# Altium PCB SensorBoard.PcbDoc (part 4 of 5)
Units mm, origin at the board's own origin, x right, y up, seen from the top; angles counter-clockwise.
Board outline 133.86 x 67.84 mm, 4 copper layers (Top Layer, Power Plane, Ground Plane, Bottom Layer), stack 1.586 mm thick; 244 components, 150 nets, 825 pads, 904 vias.
Unrouted connection lines stored in the file: 43.
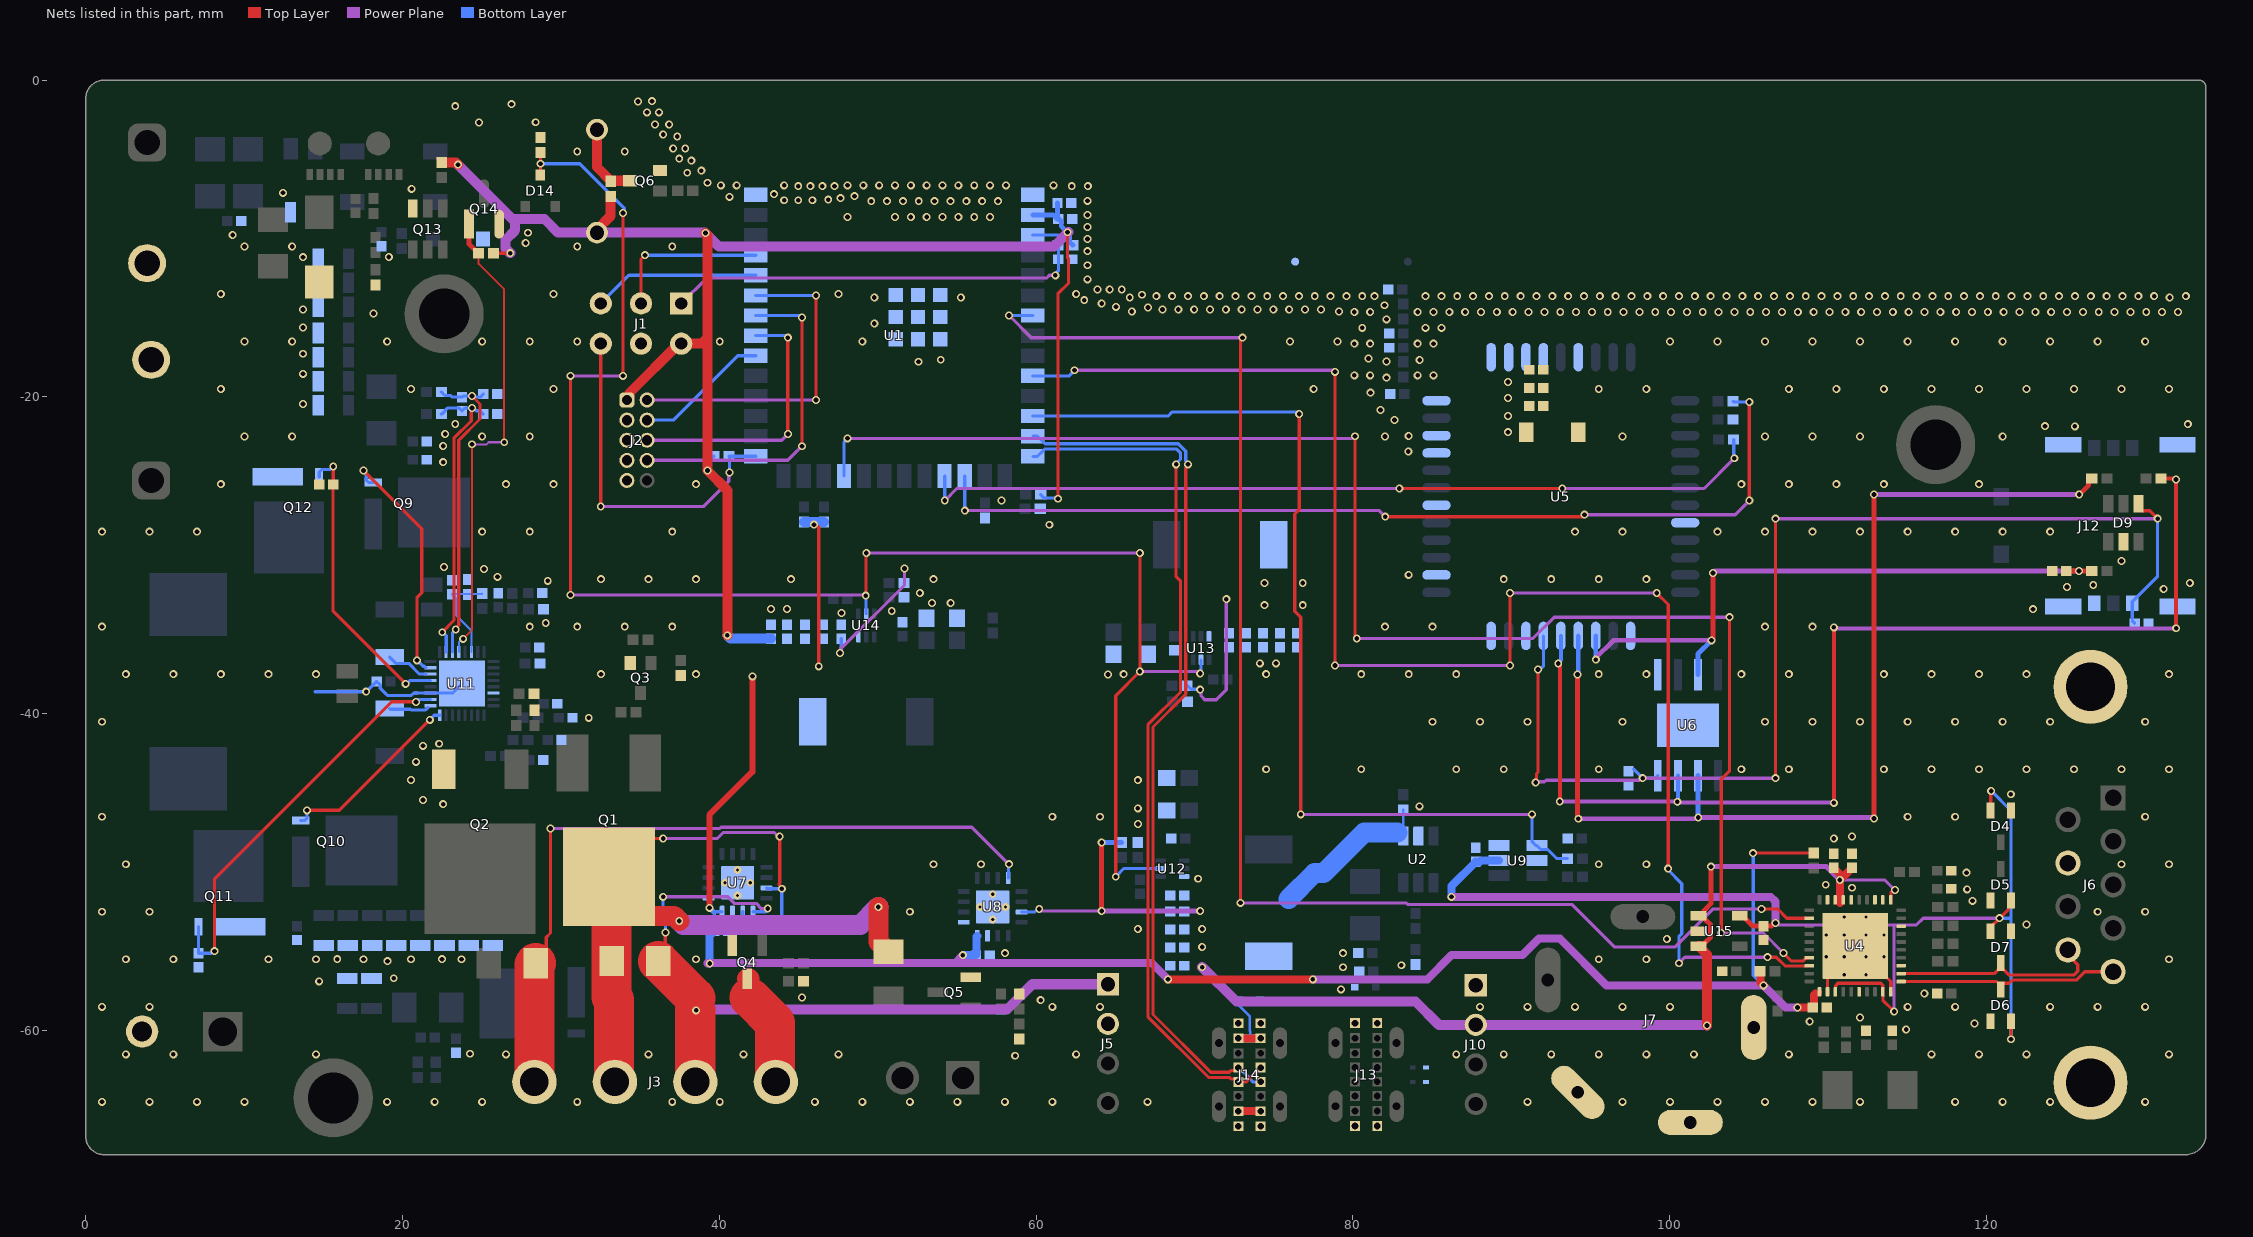
[diagram p4: the nets of this part, all layers, seen from the top]

## Via types
v1: diameter 0.5, hole 0.3, Top Layer to Bottom Layer, tented both sides, 566 vias
v2: diameter 0.5, hole 0.3, Top Layer to Bottom Layer, 318 vias
v3: diameter 0.5, hole 0.2, Top Layer to Bottom Layer, 20 vias

## Nets (pads, with @x,y where several pads share a name; then routed paths per layer and width w, separated by ;. In a path a pad name is that pad's centre, name@x,y a point inside that pad or via, vN(x,y) a via of type N, cw(c..) or ccw(c..) an arc to the next point about the centre after c; other vN are vias at no path point) (continued)
DGND: (continued)
  other v1: 1.025,-64.505 4.025,-64.505 7.025,-64.505 10.025,-64.505 19.025,-64.505 22.025,-64.505 25.025,-64.505 31.025,-64.505 37.025,-64.505 40.025,-64.505 46.025,-64.505 49.025,-64.505 52.025,-64.505 55.025,-64.505 58.025,-64.505 61.025,-64.505 67.025,-64.505 91.025,-64.505 97.025,-64.505 100.025,-64.505 103.025,-64.505 106.025,-64.505 109.025,-64.505 112.025,-64.505 118.025,-64.505 121.025,-64.505 124.025,-64.505 130.025,-64.505 58.674,-61.595 2.525,-61.505 5.525,-61.505 14.525,-61.505 26.525,-61.505 35.525,-61.505 41.525,-61.505 47.525,-61.505 62.525,-61.505 86.525,-61.505 89.525,-61.505 92.525,-61.505 95.525,-61.505 98.525,-61.505 101.525,-61.505 107.525,-61.505 116.525,-61.505 119.525,-61.505 122.525,-61.505 131.525,-61.505 24.257,-61.468 114.935,-59.944 119.253,-59.563 108.839,-59.436 112.014,-59.182 1.025,-58.505 4.025,-58.505 61.025,-58.505 64.025,-58.505 88.025,-58.505 91.025,-58.505 94.025,-58.505 97.025,-58.505 100.025,-58.505 115.025,-58.505 118.025,-58.505 124.025,-58.505 127.025,-58.505 130.025,-58.505 60.285,-58.086 45.212,-57.912 116.078,-57.658 79.248,-57.404 14.732,-56.896 19.442,-56.704 79.375,-56.007 83.058,-55.88 19.05,-55.626 2.525,-55.505 5.525,-55.505 11.525,-55.505 14.525,-55.505 15.875,-55.499 17.525,-55.505 20.525,-55.505 22.479,-55.499 23.72,-55.505 38.525,-55.505 95.525,-55.505 98.525,-55.505 131.525,-55.505 58.039,-55.118 79.375,-55.118 99.822,-54.229 66.421,-53.594 122.538,-53.304 1.025,-52.505 4.025,-52.505 52.025,-52.505 127.025,-52.505 130.025,-52.505 119.126,-51.816 118.786,-51.089 111.519,-50.991 109.855,-50.8 70.231,-50.419 118.745,-50.038 2.525,-49.505 53.525,-49.505 56.525,-49.505 95.525,-49.505 98.525,-49.505 128.525,-49.505 131.525,-49.505 110.363,-47.879 111.506,-47.752 66.431,-46.957 1.025,-46.505 61.025,-46.505 64.025,-46.505 115.025,-46.505 118.025,-46.505 130.025,-46.505 66.421,-45.974 84.201,-45.847 22.56,-45.709 21.29,-45.455 121.539,-45.085 20.528,-44.185 66.421,-44.196 74.525,-43.505 80.525,-43.505 86.525,-43.505 89.525,-43.505 95.525,-43.505 104.525,-43.505 107.525,-43.505 113.525,-43.505 116.525,-43.505 119.525,-43.505 122.525,-43.505 125.525,-43.505 128.525,-43.505 131.525,-43.505 20.841,-43.037 21.29,-42.026 22.306,-41.899 1.025,-40.505 85.025,-40.505 88.025,-40.505 91.025,-40.505 97.025,-40.505 106.025,-40.505 109.025,-40.505 112.025,-40.505 115.025,-40.505 118.025,-40.505 121.025,-40.505 124.025,-40.505 130.025,-40.505 31.75,-40.259 64.532,-37.53 2.525,-37.505 5.525,-37.505 8.525,-37.505 11.525,-37.505 14.525,-37.505 32.525,-37.505 38.525,-37.505 65.525,-37.505 74.525,-37.505 80.525,-37.505 83.525,-37.505 86.525,-37.505 95.525,-37.505 98.525,-37.505 104.525,-37.505 107.525,-37.505 113.525,-37.505 116.525,-37.505 119.525,-37.505 122.525,-37.505 131.525,-37.505 74.122,-36.819 75.138,-36.819 1.025,-34.505 28.025,-34.505 31.025,-34.505 34.025,-34.505 37.025,-34.505 82.025,-34.505 85.025,-34.505 106.025,-34.505 109.025,-34.505 29.037,-34.279 47.706,-33.644 50.881,-33.517 43.261,-33.39 44.277,-33.39 122.936,-33.401 53.421,-33.009 54.606,-33.011 52.659,-32.374 131.191,-32.131 125.095,-32.004 126.746,-31.877 132.842,-31.75 29.164,-31.612 32.525,-31.505 35.525,-31.505 38.525,-31.505 44.525,-31.505 53.525,-31.505 89.525,-31.505 92.525,-31.505 95.525,-31.505 98.525,-31.505 25.989,-31.358 83.52,-31.231 25.146,-30.861 22.606,-30.734 128.524,-30.353 1.025,-28.505 4.025,-28.505 7.025,-28.505 25.025,-28.505 28.025,-28.505 37.025,-28.505 94.025,-28.505 97.025,-28.505 103.025,-28.505 106.025,-28.505 109.025,-28.505 112.025,-28.505 115.025,-28.505 118.025,-28.505 121.025,-28.505 124.025,-28.505 60.833,-28.067 57.821,-26.546 8.525,-25.505 26.525,-25.505 29.525,-25.505 38.525,-25.505 104.525,-25.505 107.525,-25.505 110.525,-25.505 113.525,-25.505 119.525,-25.505 22.56,-24.119 83.501,-23.445 22.56,-23.103 10.025,-22.505 13.025,-22.505 25.025,-22.505 28.025,-22.505 82.025,-22.505 97.025,-22.505 106.025,-22.505 109.025,-22.505 112.025,-22.505 121.025,-22.505 83.52,-22.468 22.687,-22.341 125.582,-21.856 123.698,-21.844 23.322,-21.706 132.715,-21.717 82.631,-21.452 81.742,-20.817 13.716,-20.447 81.11,-19.731 8.525,-19.505 20.525,-19.505 29.525,-19.505 77.525,-19.505 95.525,-19.505 98.525,-19.505 107.525,-19.505 110.525,-19.505 113.525,-19.505 116.525,-19.505 119.525,-19.505 122.525,-19.505 125.525,-19.505 128.525,-19.505 131.525,-19.505 82.123,-18.785 80.09,-18.637 81.09,-18.637 84.09,-18.637 85.09,-18.637 13.716,-18.542 52.578,-17.78 82.123,-17.769 53.975,-17.653 84.215,-17.662 80.983,-17.572 13.716,-17.272 80.09,-16.637 81.09,-16.637 84.09,-16.637 85.09,-16.637 10.025,-16.505 13.025,-16.505 19.025,-16.505 25.025,-16.505 28.025,-16.505 31.025,-16.505 40.025,-16.505 49.025,-16.505 76.025,-16.505 79.025,-16.505 100.025,-16.505 103.025,-16.505 106.025,-16.505 109.025,-16.505 112.025,-16.505 115.025,-16.505 118.025,-16.505 121.025,-16.505 124.025,-16.505 127.025,-16.505 130.025,-16.505 80.59,-15.637 84.59,-15.637 85.59,-15.637 13.716,-15.621 49.784,-15.367 82.123,-15.102 18.161,-14.732 80.09,-14.637 81.09,-14.637 84.09,-14.637 85.09,-14.637 86.09,-14.637 87.09,-14.637 88.09,-14.637 89.09,-14.637 90.09,-14.637 91.09,-14.637 92.09,-14.637 93.09,-14.637 94.09,-14.637 95.09,-14.637 96.09,-14.637 97.09,-14.637 98.09,-14.637 99.09,-14.637 100.09,-14.637 101.09,-14.637 102.09,-14.637 103.09,-14.637 104.09,-14.637 105.09,-14.637 106.09,-14.637 107.09,-14.637 108.09,-14.637 109.09,-14.637 110.09,-14.637 111.09,-14.637 112.09,-14.637 113.09,-14.637 114.09,-14.637 115.09,-14.637 116.09,-14.637 117.09,-14.637 118.09,-14.637 119.09,-14.637 120.09,-14.637 121.09,-14.637 122.09,-14.637 123.09,-14.637 124.09,-14.637 125.09,-14.637 126.09,-14.637 127.09,-14.637 128.09,-14.637 129.09,-14.637 130.09,-14.637 131.09,-14.637 132.09,-14.637 66.04,-14.605 79.121,-14.605 13.716,-14.478 67.978,-14.478 68.978,-14.478 69.978,-14.478 70.978,-14.478 71.978,-14.478 72.978,-14.478 73.978,-14.478 74.978,-14.478 75.978,-14.478 76.978,-14.478 77.978,-14.478 67.056,-14.351 65.043,-14.312 81.996,-14.213 64.135,-14.097 63.04,-13.888 49.784,-13.716 55.245,-13.716 65.913,-13.716 131.572,-13.716 67.59,-13.637 68.59,-13.637 69.59,-13.637 70.59,-13.637 71.59,-13.637 72.59,-13.637 73.59,-13.637 74.59,-13.637 75.59,-13.637 76.59,-13.637 77.59,-13.637 78.59,-13.637 79.59,-13.637 80.59,-13.637 81.364,-13.635 84.59,-13.637 85.59,-13.637 86.59,-13.637 87.59,-13.637 88.59,-13.637 89.59,-13.637 90.59,-13.637 91.59,-13.637 92.59,-13.637 93.59,-13.637 94.59,-13.637 95.59,-13.637 96.59,-13.637 97.59,-13.637 98.59,-13.637 99.59,-13.637 100.59,-13.637 101.59,-13.637 102.59,-13.637 103.59,-13.637 104.59,-13.637 105.59,-13.637 106.59,-13.637 107.59,-13.637 108.59,-13.637 109.59,-13.637 110.59,-13.637 111.59,-13.637 112.59,-13.637 113.59,-13.637 114.59,-13.637 115.59,-13.637 116.59,-13.637 117.59,-13.637 118.59,-13.637 119.59,-13.637 120.59,-13.637 121.59,-13.637 122.59,-13.637 123.59,-13.637 124.59,-13.637 125.59,-13.637 126.59,-13.637 127.59,-13.637 128.59,-13.637 129.59,-13.637 130.59,-13.637 132.59,-13.637 66.677,-13.55 8.525,-13.505 29.525,-13.505 47.525,-13.505 62.525,-13.505 63.881,-13.208 64.643,-13.208 65.405,-13.208 63.246,-12.573 63.246,-11.684 13.716,-11.176 19.131,-11.165 63.246,-10.795 10.025,-10.505 13.025,-10.505 31.025,-10.505 37.025,-10.505 27.767,-10.276 63.246,-10.033 9.271,-9.779 27.918,-9.632 63.246,-9.271 48.09,-8.637 51.09,-8.637 52.09,-8.637 53.09,-8.637 54.09,-8.637 55.09,-8.637 56.09,-8.637 57.09,-8.637 63.246,-8.509 49.59,-7.637 50.59,-7.637 51.59,-7.637 52.59,-7.637 53.59,-7.637 54.59,-7.637 55.59,-7.637 56.59,-7.637 57.59,-7.637 63.246,-7.62 44.089,-7.579 44.978,-7.579 45.867,-7.579 46.872,-7.546 47.645,-7.452 40.64,-7.366 48.534,-7.325 43.454,-7.198 12.446,-7.112 20.574,-6.858 44.978,-6.69 45.74,-6.69 46.502,-6.69 47.264,-6.69 62.25,-6.69 63.266,-6.69 40.09,-6.637 41.09,-6.637 44.09,-6.637 48.09,-6.637 49.09,-6.637 50.09,-6.637 51.09,-6.637 52.09,-6.637 53.09,-6.637 54.09,-6.637 55.09,-6.637 56.09,-6.637 57.09,-6.637 58.09,-6.637 61.09,-6.637 39.243,-6.477 37.973,-5.842 38.862,-5.715 38.227,-5.08 37.465,-4.953 31.025,-4.505 34.025,-4.505 37.084,-4.318 37.846,-4.318 37.338,-3.556 36.449,-3.429 35.941,-2.794 36.83,-2.794 24.831,-2.668 28.402,-2.656 35.433,-2.032 36.195,-2.032 23.322,-1.64 26.878,-1.513 34.863,-1.345 35.752,-1.327
  other v3: 111.028,-56.485 112.398,-56.485 109.888,-55.345 113.538,-55.345 109.888,-53.975 111.028,-53.975 112.398,-53.975 113.538,-53.975 57.258,-52.997 111.028,-52.835 112.398,-52.835 56.458,-52.197 58.058,-52.197 41.148,-51.473 57.258,-51.397 40.348,-50.673 41.948,-50.673 41.148,-49.873
ESP32_EN: C1.2 J1.1 R1.1 U1.3 | length 28.6
  Power Plane w0.203: J1.1@37.592,-14.097 39.192,-12.497 60.655,-12.497 60.833,-12.319 v2(61.214,-12.319)
  Bottom Layer w0.203: U1.3@59.791,-9.779 61.409,-9.779 61.409,-10.16 61.409,-10.414 61.409,-10.922 C1.2@61.409,-11.303 61.409,-12.044 61.214,-12.239 v2(61.214,-12.319)
ESP32_IO0: J1.6 R2.1 U1.27 | length 22.3
  Top Layer w0.203: v2(32.512,-26.924) J1.6@32.512,-16.637
  Power Plane w0.203: v2(32.512,-26.924) 38.989,-26.924 40.593,-25.32 40.593,-24.812 v2(40.64,-24.765)
  Bottom Layer w0.203: v2(40.64,-24.765) 40.64,-23.782 R2.1@40.607,-23.749 U1.27@42.291,-23.749
FAN+: J3.2 J5.1 R13.2 U7.1 | length 46.5
  Top Layer w0.203: R13.2@36.146,-55.626 36.576,-55.196 36.576,-53.839 v2(36.603,-53.812)
  Top Layer w2.54: R13.2@36.146,-55.626 38.481,-57.961 ; J3.2@38.481,-63.246 v2@38.481,-58.727
  Power Plane w0.203: v2(36.449,-51.562) 40.524,-51.562 40.939,-51.977 42.325,-51.977 42.651,-52.303 v2(43.053,-52.303)
  Power Plane w0.635: v2(38.533,-58.727) 38.809,-58.727 38.862,-58.674 58.166,-58.674 59.757,-57.083 J5.1@64.533,-57.083
  Bottom Layer w0.203: v2(36.449,-51.562) 36.449,-52.845 36.603,-52.998 v2(36.603,-53.812) ; U7.1@42.123,-52.498 v2@42.934,-52.498
FAN-: J3.1 Q4.3 | length 7.3
  Top Layer w1.27: Q4.3@41.749,-56.737 41.895,-56.737 41.91,-56.752 41.91,-57.912
  Top Layer w2.54: 41.91,-57.912 43.511,-59.513 43.511,-63.196 J3.1@43.561,-63.246
GSM_CLK: R42.2 U5.16 U6.6 | length 67.9
  Top Layer w0.3: v2(94.174,-37.528) 94.174,-46.676 94.231,-46.733 v2(94.231,-46.635) ; v2(112.903,-46.609) v2(112.903,-26.162) ; v2(125.857,-26.162) 126.452,-25.567 126.452,-25.321 126.627,-25.146 R42.2@126.652,-25.146
  Power Plane w0.3: v2(94.231,-46.635) 101.701,-46.635 101.727,-46.609 101.753,-46.609 v2(101.804,-46.558) 112.852,-46.558 v2(112.903,-46.609) ; v2(112.903,-26.162) v2(125.857,-26.162)
  Bottom Layer w0.3: v2(94.174,-37.528) 94.234,-37.467 94.234,-37.465 94.229,-37.46 U5.16@94.229,-35.088 ; U6.6@101.789,-43.909 101.797,-43.917 101.797,-46.55 v2(101.804,-46.558)
GSM_DATA: C21.2 R41.2 U5.15 U6.3 | length 41.2
  Top Layer w0.3: v2(102.642,-35.367) 102.642,-35.407 102.743,-35.306 v2(102.743,-31.115) ; C21.2@124.968,-30.988 C21.2@125.027,-30.988 v2(125.84,-30.988) R41.2@126.652,-30.988
  Power Plane w0.3: v2(95.337,-36.589) 95.324,-36.576 95.25,-36.576 96.459,-35.367 v2(102.642,-35.367) ; v2(102.743,-31.115) 102.87,-30.988 v2(125.84,-30.988)
  Bottom Layer w0.3: U5.15@95.329,-35.088 95.333,-35.092 95.333,-36.585 v2(95.337,-36.589) ; U6.3@101.789,-37.543 101.789,-36.22 v2(102.642,-35.367)
GSM_RST: R43.2 U5.17 U6.7 | length 73.1
  Top Layer w0.254: v2(92.964,-36.83) 92.964,-36.897 93.062,-36.994 v2(93.062,-45.538) ; v2(110.363,-45.629) 110.327,-45.593 110.236,-45.593 110.363,-45.466 v2(110.363,-34.544) ; R43.2@131.031,-25.146 131.901,-25.146 v2(131.972,-25.217) 131.972,-34.525 131.953,-34.544 131.953,-34.58 v2(131.979,-34.606)
  Power Plane w0.254: v2(93.062,-45.538) 93.073,-45.55 100.475,-45.55 100.52,-45.595 110.329,-45.595 v2(110.363,-45.629) ; v2(110.363,-34.544) 110.425,-34.606 v2(131.979,-34.606)
  Bottom Layer w0.254: v2(92.964,-36.83) 92.964,-36.763 93.129,-36.598 U5.17@93.129,-35.088 ; v2(100.486,-45.561) 100.486,-45.691 100.519,-45.658 U6.7@100.519,-43.909
GSM_RX: R38.2 U1.18 | length 53.8
  Top Layer w0.203: v2(82.931,-25.781) v2(93.218,-25.781)
  Power Plane w0.203: v2(54.229,-26.543) 54.991,-25.781 v2(82.931,-25.781) ; v2(93.218,-25.781) 102.174,-25.781 v2(104.085,-23.87)
  Bottom Layer w0.203: U1.18@54.216,-24.999 54.229,-25.012 v2(54.229,-26.543) ; R38.2@104.042,-22.692 104.042,-23.847 104.013,-23.876 104.079,-23.876 v2(104.085,-23.87)
GSM_TX: R36.2 U1.17 | length 59.6
  Top Layer w0.203: v2(82.042,-27.559) 94.488,-27.559 v2(94.615,-27.432) ; v2(105.029,-26.543) v2(105.029,-20.32)
  Power Plane w0.203: v2(55.499,-27.178) 81.661,-27.178 v2(82.042,-27.559) ; v2(94.615,-27.432) 104.14,-27.432 v2(105.029,-26.543)
  Bottom Layer w0.203: U1.17@55.486,-24.999 55.486,-27.165 v2(55.499,-27.178) ; R36.2@104.009,-20.279 104.05,-20.32 v2(105.029,-20.32)
GSM_VCC: C22.2 C98.2 D9.4 J12.S1 U5.18 U6.8 | length 76
  Top Layer w0.203: v2(91.538,-44.335) 91.592,-44.281 91.592,-43.781 91.694,-43.679 v2(91.694,-37.211) ; v2(106.68,-44.069) v2(106.68,-27.686) ; D9.4@129.601,-26.74 129.601,-26.965 129.824,-27.188 130.312,-27.188 v2(130.81,-27.686)
  Power Plane w0.203: v2(91.538,-44.335) 91.575,-44.298 92.092,-44.298 92.194,-44.196 98.091,-44.196 98.218,-44.069 v2(98.298,-44.069) v2(106.68,-44.069) ; v2(106.68,-27.686) v2(130.81,-27.686)
  Bottom Layer w0.203: v2(91.694,-37.211) 91.821,-37.211 92.029,-37.003 U5.18@92.029,-35.088 ; 97.725,-43.496 v2(98.298,-44.069) 99.101,-44.069 99.249,-43.921 U6.8@99.249,-43.909 ; C98.2@129.212,-33.983 J12.S1@129.212,-33.021 129.212,-32.921 130.81,-31.323 v2(130.81,-27.686) ; C98.2@129.227,-34.163 C98.2@129.354,-34.29
HEATER: J3.4 R7.1 U8.12 | length 47.3
  Top Layer w0.203: R7.1@28.399,-55.753 29.072,-55.08 29.072,-54.113 29.337,-53.848 v2(29.337,-47.244)
  Top Layer w2.54: J3.4@28.321,-63.246 28.321,-55.831 R7.1@28.399,-55.753
  Power Plane w0.203: v2(29.337,-47.244) 40.032,-47.244 40.108,-47.168 55.931,-47.168 58.279,-49.516 v2(58.279,-49.498)
  Bottom Layer w0.203: U8.12@58.233,-50.372 58.256,-50.349 58.256,-49.521 v2(58.279,-49.498)
HIDRV1: Q9.4 U11.31 | length 15.6
  Top Layer w0.203: v2(17.526,-24.638) 21.209,-28.321 21.209,-32.363 20.904,-32.668 v2(20.904,-36.627)
  Bottom Layer w0.203: v2(17.526,-24.638) 17.698,-24.81 17.698,-25.252 17.846,-25.4 Q9.4@18.146,-25.4 ; v2(20.904,-36.627) 20.914,-36.627 21.29,-37.003 21.38,-37.003 U11.31@21.476,-37.098
HIDRV2: Q10.4 U11.24 | length 11.8
  Top Layer w0.203: v2(13.97,-46.101) 16.002,-46.101 v2(21.717,-40.386)
  Bottom Layer w0.203: Q10.4@13.574,-46.736 13.822,-46.736 13.97,-46.588 v2(13.97,-46.101) ; v2(21.717,-40.386) 22.003,-40.1 U11.24@22.349,-40.1
ILIM_HIZ: C64.1 R67.2 R69.1 U11.6 | length 6.1
  Bottom Layer w0.127: U11.6@24.349,-36.1 24.349,-34.755 23.36,-33.767 23.36,-32.69 C64.1@23.114,-32.444 24.993,-32.444 R67.2@25.019,-32.418
IN_N: D6.3 J6.5 U4.1 | length 14.1
  Top Layer w0.203: U4.1@114.613,-56.91 120.644,-56.91 D6.3@120.904,-57.17 ; D6.3@120.904,-57.42 D6.3@120.904,-57.17 ; J6.5@127.993,-56.286 126.213,-56.286 125.679,-56.82 121.628,-56.82 121.426,-57.022 121.052,-57.022 D6.3@120.904,-57.17
IN_P: D7.3 J6.9 U4.2 | length 13.5
  Top Layer w0.203: U4.2@114.613,-56.41 120.481,-56.41 D7.3@120.904,-55.987 ; D7.3@120.904,-55.737 D7.3@120.904,-55.987 ; J6.9@125.149,-54.915 125.149,-55.231 125.768,-55.851 125.768,-56.264 125.542,-56.49 121.407,-56.49 D7.3@120.904,-55.987
LODRV1: C41.2 Q12.4 U11.29 | length 18.6
  Top Layer w0.203: C41.2@15.612,-25.527 15.612,-33.528 20.193,-38.109 v2(20.193,-38.114) ; C41.2@15.621,-25.518 v2(15.621,-24.384)
  Bottom Layer w0.203: Q12.4@14.732,-25.038 14.732,-24.738 14.88,-24.59 15.415,-24.59 v2(15.621,-24.384) ; v2(20.193,-38.114) 20.273,-38.114 20.487,-37.9 U11.29@21.749,-37.9
LODRV2: C42.2 Q11.4 U11.26 | length 25.6
  Top Layer w0.203: v2(8.128,-54.991) 8.128,-50.419 19.304,-39.243 20.824,-39.243 v2(20.839,-39.258)
  Bottom Layer w0.203: Q11.4@7.112,-53.448 C42.2@7.112,-55.118 7.921,-55.118 8.048,-54.991 v2(8.128,-54.991) ; v2(20.839,-39.258) 20.839,-39.232 20.971,-39.1 U11.26@21.749,-39.1
MTCK: J2.4 U1.32 | length 8.5
  Bottom Layer w0.203: J2.4@35.433,-21.463 37.084,-21.463 41.148,-17.399 U1.32@42.291,-17.399
MTDI: J2.8 U1.34 | length 21.2
  Top Layer w0.203: v2(45.212,-23.114) v2(45.212,-14.986)
  Power Plane w0.203: J2.8@35.433,-24.003 44.323,-24.003 v2(45.212,-23.114)
  Bottom Layer w0.203: U1.34@42.291,-14.859 45.085,-14.859 v2(45.212,-14.986)
MTDO: J2.6 U1.33 | length 17.2
  Top Layer w0.203: v2@44.323,-22.352 v2(44.323,-16.256)
  Power Plane w0.203: J2.6@35.433,-22.733 43.942,-22.733 v2@44.323,-22.352
  Bottom Layer w0.203: U1.33@42.291,-16.129 44.196,-16.129 v2(44.323,-16.256)
  other v2: 44.333,-22.34
MTMS: J2.2 U1.35 | length 21.1
  Top Layer w0.203: v2(46.101,-20.193) v2(46.101,-13.589)
  Power Plane w0.203: J2.2@35.433,-20.193 v2(46.101,-20.193)
  Bottom Layer w0.203: U1.35@42.291,-13.589 v2(46.101,-13.589)
NetBUZ1_2: BUZ1.2 Q6.3 R34.2 | length 4.8
  Top Layer w0.635: BUZ1.2@32.273,-3.124 32.273,-5.484 R34.2@33.147,-6.358 ; R34.2@33.147,-6.383 R34.2@33.147,-6.358 ; Q6.3@34.356,-6.35 33.155,-6.35 R34.2@33.147,-6.358